# Altium PCB PWR_BOard_final.PcbDoc (part 2 of 2)
Units mm, origin at the board's own origin, x right, y up, seen from the top; angles counter-clockwise.
Board outline 72 x 52 mm, 2 copper layers (Top Layer, Bottom Layer); 122 components, 53 nets, 264 pads, 86 vias.
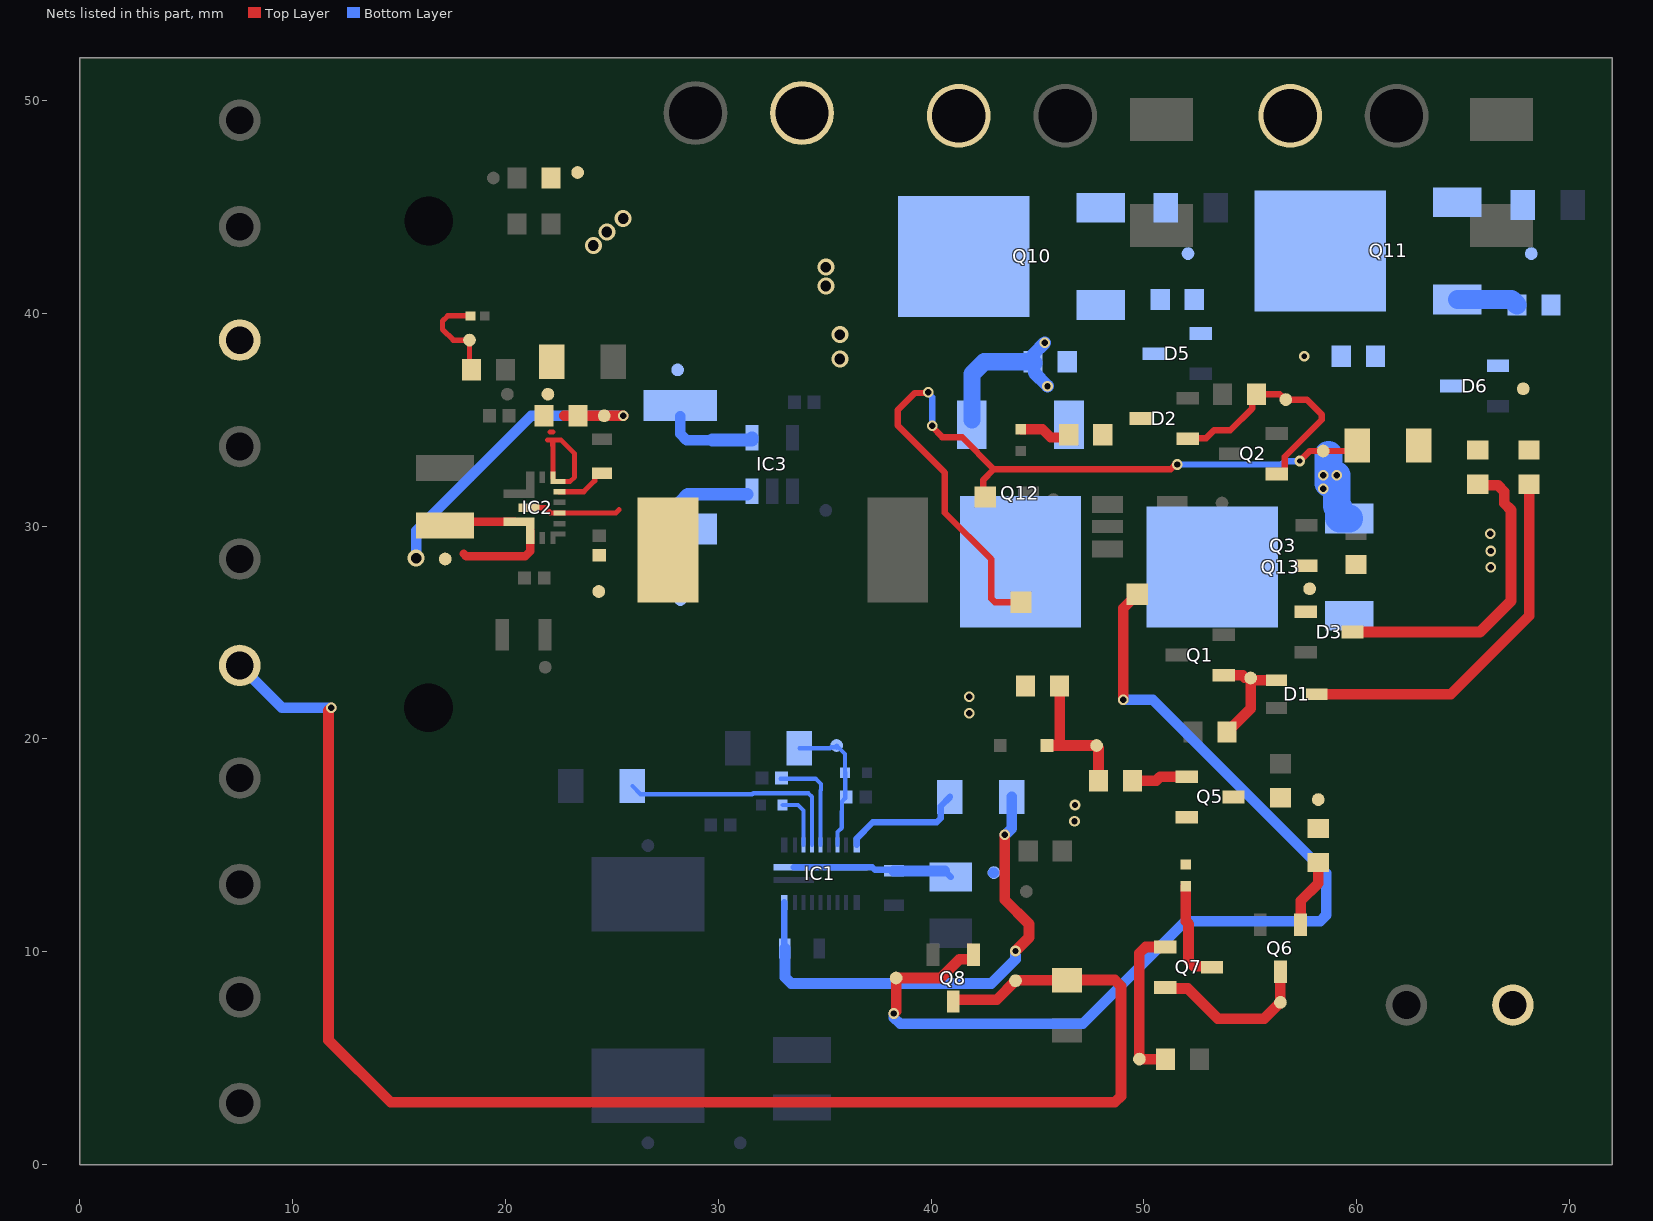
[diagram p2: the nets of this part, all layers, seen from the top]

## Via types
v1: diameter 0.8, hole 0.5, Top Layer to Bottom Layer, 43 vias
v2: diameter 0.5, hole 0.3, Top Layer to Bottom Layer, 34 vias
v3: diameter 0.5, hole 0.25, Top Layer to Bottom Layer, 6 vias
v4: diameter 0.4, hole 0.25, Top Layer to Bottom Layer, 3 vias

## Nets (pads, with @x,y where several pads share a name; then routed paths per layer and width w, separated by ;. In a path a pad name is that pad's centre, name@x,y a point inside that pad or via, vN(x,y) a via of type N, cw(c..) or ccw(c..) an arc to the next point about the centre after c; other vN are vias at no path point) (continued)
NetCcomp2_1: Ccomp2.1 Rcomp2.1 TP27.TP? | length 4.8
  Top Layer w0.25: Ccomp2.1@18.337,39.852 Ccomp2.1@18.362,39.878 17.295,39.878 17.041,39.624 17.041,39.243 17.549,38.735 TP27.TP?@18.311,38.735 18.311,37.427 Rcomp2.1@18.4,37.338
NetCff1_2: Cff1.2 IC1.7 Rfbb1.1 Rfbt1.2 TP20.TP? | length 6.8
  Bottom Layer w0.2: Rfbb1.1@33.814,19.558 35.243,19.558 35.293,19.608 TP20.TP?@35.483,19.608 ; TP20.TP?@35.56,19.577 TP20.TP?@35.56,19.685 35.951,19.295 35.951,18.424 Rfbt1.2@35.96,18.415 35.96,17.228 Cff1.2@35.964,17.224 ; IC1.7@35.601,15.02 35.601,15.62 35.801,15.82 35.801,16.588 35.812,16.599 35.812,17.062 Cff1.2@35.964,17.214
NetCss1_1: Css1.1 IC1.5 | length 4.9
  Bottom Layer w0.2: Css1.1@32.927,18.13 34.575,18.13 34.82,17.885 34.82,17.592 34.801,17.573 34.801,16.308 34.801,15.826 34.801,15.696 IC1.5@34.801,15.02
NetCvcc1_1: Cvcc1.1 IC1.19 Rpg1.2 | length 23.5
  Top Layer w0.5: v2(43.457,15.494) 43.457,12.446 44.6,11.303 44.6,10.668 v2(43.965,10.033)
  Bottom Layer w0.2: IC1.19@33.101,12.32 IC1.19@33.117,12.304 ; Cvcc1.1@33.117,10.175 Cvcc1.1@33.132,10.16
  Bottom Layer w0.3: IC1.19@33.101,12.32 33.101,10.191 Cvcc1.1@33.117,10.175
  Bottom Layer w0.5: Cvcc1.1@33.132,10.16 33.132,8.802 33.425,8.509 42.822,8.509 43.965,9.652 v2(43.965,10.033) ; v2(43.457,15.494) 43.492,15.494 43.785,15.787 Rpg1.2@43.785,17.272
NetCvcc2_1: Cvcc2.1 IC2.11 | length 2.5
  Top Layer w0.25: IC2.11@22.534,31.611 23.671,31.611 24.189,32.129 24.189,32.329 24.334,32.474 Cvcc2.1@24.534,32.474
NetD1_1: D1.1 Q1.1 R10.1 TP8.TP? | length 5.3
  Top Layer w0.5: Q1.1@53.744,22.987 54.633,22.987 TP8.TP?@54.741,22.879 ; R10.1@53.909,20.32 53.909,20.37 54.109,20.57 54.159,20.57 55.014,21.425 TP8.TP?@55.014,22.86 55.041,22.86 55.153,22.748 D1.1@56.223,22.748
NetD1_3: D1.3 R6.2 | length 17.7
  Top Layer w0.5: D1.3@58.123,22.098 64.412,22.098 68.095,25.781 R6.2@68.095,31.966
NetD2_1: D2.1 Q2.1 R11.1 TP9.TP? | length 11.6
  Top Layer w0.3: D2.1@52.05,34.102 52.068,34.12 52.918,34.12 53.293,34.495 54.053,34.495 55.083,35.525 55.083,35.995 R11.1@55.283,36.195 56.384,36.195 56.638,35.941 57.658,35.941 58.359,35.24 58.359,34.991 56.616,33.248 56.616,32.601 56.466,32.451 Q2.1@56.241,32.451
NetD2_3: D2.3 R8.2
NetD3_1: D3.1 Q3.1 R9.1 TP33.TP?
NetD3_3: D3.3 R23.2 | length 14.9
  Top Layer w0.5: D3.3@59.647,25.019 65.786,25.019 67.244,26.477 67.244,30.751 66.929,31.066 66.929,31.617 66.636,31.909 65.739,31.909 R23.2@65.682,31.966
NetD4_1: D4.1 R12.2 R13.1 TP28.TP? | length 6.8
  Top Layer w0.5: D4.1@45.446,19.685 46.046,19.685 ; R12.2@46.035,22.479 46.041,22.473 46.041,19.69 46.046,19.685 ; TP28.TP?@47.775,19.685 TP28.TP?@47.75,19.685 ; R13.1@47.864,18.034 47.864,19.569 47.75,19.683 TP28.TP?@47.75,19.685 ; 46.046,19.685 TP28.TP?@47.75,19.685
NetD5_1: D5.1 Q10.1 R19.1 R20.2 TP38.TP?
NetD5_3: D5.3 Q10.3 Q12.3 R20.1 R24.1
NetD6_1: D6.1 Q11.1 R21.2 R22.1 TP34.TP?
NetD6_3: D6.3 Q11.3 Q13.3 R21.1 R25.1 | length 2.9
  Bottom Layer w0.9: Q11.3@64.727,40.64 67.272,40.64 R21.1@67.526,40.386
NetIC1_3: IC1.3 Rtrip1.1 | length 2.7
  Bottom Layer w0.2: Rtrip1.1@33.024,16.891 33.749,16.891 34.001,16.639 IC1.3@34.001,15.02
NetIC1_4: IC1.4 Rmode1.1 | length 10.9
  Bottom Layer w0.2: Rmode1.1@25.963,17.78 26.344,17.399 31.596,17.399 31.638,17.441 34.242,17.441 34.401,17.282 34.401,16.474 34.401,15.53 IC1.4@34.401,15.02
NetIC1_9: IC1.9 Rpg1.1 | length 5.8
  Bottom Layer w0.3: IC1.9@36.501,15.02 36.501,15.318 37.261,16.078 40.266,16.078 40.454,16.266 40.454,16.841 Rpg1.1@40.885,17.272
NetLoudSpeaker_1: LoudSpeaker.1 Q8.3 R18.2 TP?.TP? | length 72.9
  Top Layer w0.5: v2(11.811,21.463) 11.684,21.336 11.684,5.842 14.605,2.921 48.625,2.921 48.918,3.214 48.918,8.375 48.625,8.668 R18.2@46.378,8.668 46.362,8.652 43.981,8.652 TP?.TP?@43.965,8.636 43.076,7.747 41.094,7.747 41.044,7.697 Q8.3@41.044,7.663
  Bottom Layer w0.5: LoudSpeaker.1@7.516,23.448 9.501,21.463 v2(11.811,21.463)
NetNT1_2: NT1.2 NT2.1 R7.2 TP50.TP? | length 38.4
  Top Layer w0.3: v2(39.859,36.287) 39.821,36.249 39.225,36.249 38.423,35.447 38.423,34.729 40.64,32.512 40.64,30.63 42.822,28.448 42.822,26.592 42.998,26.416 NT1.2@44.219,26.416 ; v2(40.048,34.714) 40.048,34.66 40.511,34.197 40.511,34.165 41.457,34.165 42.949,32.673 ; NT2.1@42.441,31.369 42.441,32.165 42.949,32.673 ; v2(51.562,32.893) 51.481,32.893 51.261,32.673 42.949,32.673 ; v3(57.315,33.058) 57.785,33.528 59.766,33.528 R7.2@60.02,33.782
  Bottom Layer w0.3: v2(39.859,36.287) 39.859,36.233 40.048,36.044 v2(40.048,34.714) ; v2(51.562,32.893) 56.465,32.893 56.615,33.043 57.3,33.043 v3(57.315,33.058)
NetQ5_1: Q5.1 R13.2 | length 2.6
  Top Layer w0.5: R13.2@49.464,18.034 50.569,18.034 50.757,18.222 Q5.1@52.009,18.222
NetQ5_3: Q5.3 R14.1 R15.1 TP29.TP?
NetQ6_1: Q6.1 R14.2 | length 3.3
  Top Layer w0.5: Q6.1@57.361,11.26 57.368,11.267 57.368,12.387 58.189,13.208 R14.2@58.189,14.186
NetQ6_3: Q6.3 Q7.2 TP30.TP? | length 7.8
  Top Layer w0.5: Q7.2@50.993,8.321 51.043,8.271 52.054,8.271 53.467,6.858 55.649,6.858 TP30.TP?@56.411,7.62 Q6.3@56.411,9.06
NetQ7_1: Q7.1 R31.1 TP31.TP? | length 7.5
  Top Layer w0.5: Q7.1@50.993,10.221 50.077,10.221 49.784,9.928 TP31.TP?@49.784,4.953 R31.1@51.016,4.953
NetQ7_3: Q7.3 R17.1 | length 4.8
  Top Layer w0.5: R17.1@51.966,13.077 51.966,11.43 52.093,11.303 52.093,9.564 52.336,9.321 53.143,9.321 Q7.3@53.193,9.271
NetQ12_1: "Switch PMOS.2" Q12.1 Q13.1 R24.2 R25.2 | length 11.7
  Bottom Layer w0.6: R24.2@44.793,37.719 44.793,38.062 v2(45.339,38.608) ; R24.2@44.843,37.669 44.843,37.199 v2(45.466,36.576)
  Bottom Layer w0.8: Q12.1@41.91,34.983 41.91,37.133 42.496,37.719 R24.2@44.793,37.719 R24.2@44.843,37.669
  Bottom Layer w1.3: 58.674,32.004 58.674,33.353 ; v2(59.055,32.385) 59.055,30.945 59.154,30.846 59.154,30.401 59.203,30.353 Q13.1@59.647,30.353
  other v2: 66.294,28.067 66.294,28.829 66.271,29.631 58.42,31.75 58.42,32.385
  other v3: 57.531,37.973
On/Off: NT3.2 Q8.1 TP51.TP? | length 48.8
  Top Layer w0.5: v2(38.25,7.097) 38.354,7.201 TP51.TP?@38.354,8.763 40.455,8.763 41.332,9.639 41.944,9.639 41.994,9.689 Q8.1@41.994,9.863 ; v2(49.022,21.844) 49.022,26.139 NT3.2@49.68,26.797
  Bottom Layer w0.5: v2(38.25,7.097) 38.25,6.902 38.543,6.609 47.122,6.609 51.943,11.43 58.277,11.43 58.57,11.723 58.57,13.693 50.419,21.844 v2(49.022,21.844)
out_Batt: "Engine Supply.1" Cin1.1 Cinx1.1 IC1.10 IC1.21 IC3.4 Q5.2 R1.2 R5.1 R6.1 R7.1 R8.1 R12.1 R17.2 R23.1 Rshunt.2 TP3.TP? TP7.TP? TP16.TP? TP35.TP? | length 14.3
  Top Layer w0.475: R5.1@44.219,34.548 45.232,34.548 45.617,34.163 R8.1@46.34,34.163
  Bottom Layer w0.3: IC1.21@33.551,13.97 IC1.10@36.051,13.97 37.234,13.97 37.361,13.843 38.199,13.843 Cinx1.1@38.25,13.792 ; Cin1.1@40.637,13.792 Cin1.1@40.917,13.512
  Bottom Layer w0.5: Rshunt.2@28.217,35.158 28.217,34.329 28.51,34.036 29.712,34.036 ; Cinx1.1@38.25,13.792 Cin1.1@40.637,13.792 ; TP16.TP?@42.922,13.716 TP16.TP?@42.949,13.716
  Bottom Layer w0.6: 29.712,34.036 31.585,34.036 IC3.4@31.585,34.143
  other v1: 35.71,37.846 35.71,38.989 35.052,41.275 35.052,42.164 24.13,43.18 24.765,43.815 25.527,44.45
  other v2: 46.736,16.129 46.759,16.891 41.783,21.209 41.783,21.971
Out_Batt1: Batt2.2 Q11.2
Out_Batt2: Batt1.2 Q10.2
SW: Cbst2.1 IC2.4 IC2.9 L2.2 TP22.TP? | length 4.4
  Top Layer w0.25: IC2.4@21.109,30.861 21.859,30.861 22.109,30.611 IC2.9@22.534,30.611 25.18,30.611 25.334,30.765
Ubatt: IC3.3 Q12.2 Q13.2 Rshunt.1 TP36.TP? | length 5.1
  Bottom Layer w0.6: Rshunt.1@28.217,29.358 28.217,31.145 28.568,31.496 IC3.3@31.348,31.496
Vfb: IC2.1 IC2.12 Rfbb2.2 Rfbt2.1 TP25.TP? | length 5.3
  Top Layer w0.225: 21.971,34.036 22.225,34.036 22.615,34.036 23.248,33.403 23.248,32.301 23.045,32.098 IC2.12@22.584,32.098 ; 22.098,34.417 22.234,34.417
  Top Layer w0.25: 22.225,34.036 22.225,33.782 22.234,33.773 IC2.1@22.234,32.274
Vout1: +12V.2 Cout2.1 IC2.5 IC2.14 Rfbt2.2 TP23.TP? TP24.TP? | length 23.2
  Top Layer w0.4: v1(15.805,28.488) v1@15.845,28.448 ; Cout2.1@17.168,30.019 17.36,30.211 IC2.14@20.434,30.211 ; 18.034,28.702 18.161,28.575 20.925,28.575 21.159,28.809 IC2.5@21.159,29.786
  Top Layer w0.5: 22.76,35.179 Rfbt2.2@23.406,35.179 23.899,35.179 TP24.TP?@24.384,35.179 ; TP24.TP?@24.638,35.179 v2(25.527,35.179)
  Bottom Layer w0.5: v1(15.805,28.488) 15.805,29.775 21.209,35.179 25.273,35.179
pads on no net: D1.2 D2.2 D3.2 D5.2 D6.2
copper on no net: | length 248
  Top Layer w0.254: 0,0 72,0 72,52 0,52 0,0

## Polygon pours and split planes (outlines as drawn)
GND on Bottom Layer "GND_L02_P108" (solid, remove dead copper, pour order 108): 0,52 0,0 72,0 72,52
NetQ12_1 on Bottom Layer "NETQ12_1_L02_P104" (solid, pour order 104): 57.15,38.481 57.15,37.211 57.404,37.211 57.912,36.703 57.912,31.369 59.69,31.369 59.69,32.004 59.69,38.481
NetD6_3 on Bottom Layer "NETD6_3_L02_P098" (solid, pour order 98): 68.15,41.348 68.15,39.702 68.072,39.624 65.532,39.624 65.532,36.195 65.532,24.765 59.944,24.765 59.944,38.735 62.738,38.735 62.738,41.402
NetD5_3 on Bottom Layer "NETD5_3_L02_P095" (solid, pour order 95): 45.974,33.528 45.974,41.198 51.308,41.198 51.308,35.941 48.895,33.528
NetD6_1 on Bottom Layer "NETD6_1_L02_P097" (solid, pour order 97): 62.992,46.609 62.992,43.434 66.294,43.434 68.326,41.402 68.326,39.116 68.453,38.989 67.945,38.481 65.786,38.481 65.786,36.957 69.088,36.957 70.104,37.973 70.104,42.672 69.85,42.672 68.622,43.9 68.622,46.609
NetQ12_1 on Bottom Layer "NETQ12_1_L02_P103" (solid, pour order 103): 65.913,31.496 65.913,11.811 64.897,10.795 64.897,4.064 70.612,4.064 70.739,4.191 70.612,4.318 70.612,13.716 69.215,15.113 69.215,31.369
Out_Batt1 on Bottom Layer "OUT_BATT1_L02_P102" (solid, pour order 102): 58.801,47.879 59.239,47.879 61.017,46.101 58.801,46.101
Ubatt on Bottom Layer "UBATT_L02_P101" (solid, pour order 101): 30.128,28.652 30.149,28.652 31.242,27.559 30.226,27.559
Ubatt on Bottom Layer "UBATT_L02_P099" (solid, pour order 99): 25.55,30.584 25.55,22.606 56.515,22.606 56.515,30.861 39.624,30.861 39.624,29.337 38.227,27.94 30.353,27.94 30.353,30.584
NetD6_3 on Bottom Layer "NETD6_3_L02_P100" (solid, pour order 100): 61.044,28.067 61.044,24.765 58.42,24.765 58.42,28.067
Out_Batt1 on Bottom Layer "OUT_BATT1_L02_P096" (solid, pour order 96): 54.61,51.689 54.61,47.117 54.864,46.863 54.991,46.863 54.991,40.132 61.214,40.132 61.214,46.355 59.309,46.355 59.309,51.562 59.182,51.689
NetD5_1 on Bottom Layer "NETD5_1_L02_P093" (solid, pour order 93): 46.482,45.847 46.482,42.926 50.419,42.926 51.689,41.656 51.689,38.608 53.34,38.608 53.34,40.005 53.34,43.434 52.451,43.434 51.816,44.069 51.816,45.847
Out_Batt2 on Bottom Layer "OUT_BATT2_L02_P092" (solid, pour order 92): 43.563,47.063 44.636,46.094 43.56,46.065
Out_Batt2 on Bottom Layer "OUT_BATT2_L02_P091" (solid, pour order 91): 37.846,51.689 37.846,39.751 44.704,39.751 44.704,40.132 44.704,46.101 44.069,46.101 44.069,51.689
out_Batt on Bottom Layer "OUT_BATT_L02_P055" (solid, pour order 55): 28.789,45.847 25.296,45.847 11.557,32.108 11.557,24.511 21.359,24.511 22.441,20.828 42.822,20.828 42.822,22.352 24.661,22.352 22.987,27.432 14.628,27.432 14.628,29.591 25.931,40.894 28.852,40.894
Ubatt on Bottom Layer "UBATT_L02_P018" (solid, pour order 18): 52.601,22.606 25.55,22.606 25.55,29.083 52.601,29.083
Ubatt on Bottom Layer "UBATT_L02_P002" (solid, pour order 2): 37.211,35.179 40.155,35.179 40.155,23.759 37.211,23.759
NetCboot1_2 on Bottom Layer "NETCBOOT1_2_L02_P062" (solid, pour order 62): 28.188,16.387 28.188,14.516 28.158,14.486 28.165,14.478 30.025,14.478 30.025,16.379
+5V on Bottom Layer "+5V_L02_P039" (solid, pour order 39): 14.628,6.985 14.628,0.635 42.695,0.635 42.695,3.302 29.845,3.302 29.845,6.985
NetCboot1_2 on Bottom Layer "NETCBOOT1_2_L02_P029" (solid, pour order 29): 23.241,15.756 23.241,11.43 31.011,11.43 31.011,12.7 31.265,12.954 34.948,12.954 34.948,13.589 29.337,13.589 29.337,15.716
GND on Bottom Layer "GND_L02_P070" (solid, pour order 70): 33.383,12.459 33.383,11.049 33.775,11.049 33.775,9.155 39.255,9.155 39.266,9.144 42.441,9.144 42.441,11.811 42.314,11.938 39.012,11.938 39.012,12.474
out_Batt on Bottom Layer "OUT_BATT_L02_P053" (solid, remove dead copper, pour order 53): 34.605,14.39 34.6,14.385 34.6,13.659 36.91,13.659 37.488,13.081 39.647,13.081 42.275,12.7 43.838,12.319 43.838,14.482
+5V on Bottom Layer "+5V_L02_P049" (solid, pour order 49): 13.589,23.577 13.589,6.35 21.082,6.35 21.082,23.637
out_Batt on Bottom Layer "OUT_BATT_L02_P020" (solid, pour order 20): 26.182,34.925 30.226,34.925 30.226,36.322 36.472,36.322 36.472,51.689 31.773,51.689 31.773,45.847 26.396,45.847
+5V on Bottom Layer "+5V_L02_P042" (solid, pour order 42): 20.32,0.608 10.16,0.608 10.16,10.16 4.595,10.16 4.595,19.812 20.32,19.812
+5V on Bottom Layer "+5V_L02_P051" (solid, pour order 51): 36.599,16.749 39.502,16.749 39.502,19.308 36.599,19.308
out_Batt on Bottom Layer "OUT_BATT_L02_P089" (solid, pour order 89): 45.411,16.28 45.411,16.099 45.411,14.017 43.775,14.017
out_Batt on Bottom Layer "OUT_BATT_L02_P088" (solid, pour order 88): 43.272,21.209 45.847,21.209 45.847,18.849
out_Batt on Bottom Layer "OUT_BATT_L02_P057" (solid, remove dead copper, pour order 57): 40.409,22.352 40.409,20.828 45.235,20.828 45.235,14.439 39.266,14.256 39.266,12.7 42.275,12.7 43.838,12.319 48.283,12.319 48.283,18.836 48.283,22.352
out_Batt on Bottom Layer "OUT_BATT_L02_P081" (solid, pour order 81): 14.351,28.813 14.351,26.797 16.205,26.797
+5V on Bottom Layer "+5V_L02_P079" (solid, pour order 79): 29.845,6.985 32.169,3.175 29.47,3.175
+5V on Bottom Layer "+5V_L02_P080" (solid, pour order 80): 36.83,5.415 36.83,2.921 35.327,2.921
+5V on Bottom Layer "+5V_L02_P071" (solid, pour order 71): 17.78,12.986 19.939,8.128 21.19,5.461 17.78,5.461
NetCboot1_1 on Bottom Layer "NETCBOOT1_1_L02_P030" (solid, pour order 30): 30.104,15.367 30.104,16.454 31.728,16.454 32.346,16.454 32.346,15.367
+5V on Bottom Layer "+5V_L02_P068" (solid, pour order 68): 36.322,0.635 36.322,5.969 42.695,5.969 42.695,0.635
out_Batt on Bottom Layer "OUT_BATT_L02_P063" (solid, pour order 63): 34.694,40.005 34.694,36.703 36.98,36.703 36.98,40.005
GND on Top Layer "GND_L01_P109" (solid, pour order 109): 0,52 0,0 72,0 72,52
NetQ12_1 on Top Layer "NETQ12_1_L01_P107" (solid, pour order 107): 58.166,38.989 58.166,37.211 48.387,37.211 46.976,35.8 44.821,35.8 44.821,38.979 44.831,38.989
NetQ12_1 on Top Layer "NETQ12_1_L01_P105" (solid, pour order 105): 66.802,30.226 66.802,27.432 66.675,27.559 64.008,27.559 60.325,31.242 57.785,31.242 57.785,32.766 58.928,32.766
out_Batt on Top Layer "OUT_BATT_L01_P061" (solid, pour order 61): 34.694,39.878 34.694,36.703 43.18,36.703 43.18,34.254 43.675,34.254 44.473,34.254 44.473,35.052 44.473,38.894 43.113,39.878
NetD2_3 on Top Layer "NETD2_3_L01_P022" (solid, pour order 22): 47.396,33.798 47.396,34.798 49.226,34.798 49.276,35.433 50.353,35.433 50.353,33.771
out_Batt on Top Layer "OUT_BATT_L01_P058" (solid, pour order 58): 45.593,17.272 45.593,15.24 52.728,15.24 52.728,17.207 52.728,17.272
out_Batt on Top Layer "OUT_BATT_L01_P031" (solid, pour order 31): 51.077,13.716 51.077,17.145 52.728,17.145 52.728,13.716
NetQ5_3 on Top Layer "NETQ5_3_L01_P027" (solid, pour order 27): 53.363,17.907 59.332,17.907 59.459,17.78 59.459,15.113 53.49,15.113 53.363,15.24
NetD3_1 on Top Layer "NETD3_1_L01_P024" (solid, pour order 24): 56.792,28.692 58.687,28.692 61.237,28.692 61.237,26.543 61.11,26.416 58.697,26.416 58.697,25.654 56.792,25.654
Vfb on Top Layer "VFB_L01_P036" (solid, pour order 36): 22.615,33.528 21.336,33.528 21.336,38.735 22.987,38.735 22.987,36.703 22.606,35.941 22.606,34.036
out_Batt on Top Layer "OUT_BATT_L01_P059" (solid, pour order 59): 26.398,44.432 22.763,47.879 21.336,47.879 21.336,44.981 22.883,43.434 24.141,42.175
+5V on Top Layer "+5V_L01_P052" (solid, pour order 52): 38.631,3.429 35.837,3.429 28.957,3.429 28.957,19.304 36.943,19.304 39.497,19.304 39.497,16.53 32.258,16.289 32.258,6.35 38.631,6.35
SW on Top Layer "SW_L01_P087" (solid, pour order 87): 24.574,30.765 24.838,30.765 25.334,30.765 25.334,31.695
SW on Top Layer "SW_L01_P038" (solid, remove dead copper, pour order 38): 20.525,31.186 20.534,31.177 20.534,30.561 21.721,30.561 21.737,30.545 21.737,30.41 25.459,30.41 25.972,31.051 25.871,29.098 23.775,29.098 23.752,29.075 23.759,29.068 23.759,24.511 29.083,24.511 29.083,32.766 26.035,32.766 25.146,31.877 25.146,30.84 22.121,30.84 22.121,31.176
GND on Top Layer "GND_L01_P037" (solid, remove dead copper, pour order 37): 21.486,31.242 19.327,31.242 19.327,32.004 15.009,32.004 15.009,35.814 19.551,35.814 19.708,35.656 19.708,33.147 21.486,33.147
Vout1 on Top Layer "VOUT1_L01_P078" (solid, pour order 78): 12.954,33.528 16.51,29.972 12.954,29.972
Vout1 on Top Layer "VOUT1_L01_P047" (solid, pour order 47): 15.898,30.835 15.898,27.686 10.795,27.686 10.795,34.821 8.913,36.703 4.976,36.703 4.976,41.021 12.977,41.021 14.12,41.021 14.12,33.02 14.12,30.887
out_Batt on Top Layer "OUT_BATT_L01_P086" (solid, pour order 86): 64.421,41.148 66.675,41.148 66.675,39.345
out_Batt on Top Layer "OUT_BATT_L01_P064" (solid, pour order 64): 34.29,40.767 49.553,40.767 66.167,40.767 66.167,35.814 68.73,35.814 68.73,41.506 67.564,42.672 34.29,42.672
+5V on Top Layer "+5V_L01_P046" (solid, remove dead copper, pour order 46): 36.472,31.369 40.409,31.369 40.409,20.574 19.431,20.574 19.431,23.749 22.883,23.749 36.472,23.749
Vout1 on Top Layer "VOUT1_L01_P035" (solid, pour order 35): 15.009,30.861 19.357,30.861 19.694,30.524 21.364,30.524 21.364,28.579 18.906,28.535 18.057,27.686 15.009,27.686
out_Batt on Top Layer "OUT_BATT_L01_P076" (solid, pour order 76): 41.783,37.211 43.942,35.052 43.942,37.211
+5V on Top Layer "+5V_L01_P075" (solid, pour order 75): 31.75,15.367 33.909,16.661 32.299,16.678 31.625,16.661
+5V on Top Layer "+5V_L01_P074" (solid, pour order 74): 32.004,8.654 34.401,6.096 32.004,6.096
+5V on Top Layer "+5V_L01_P073" (solid, pour order 73): 36.83,25.654 34.163,22.987 36.83,22.987
out_Batt on Top Layer "OUT_BATT_L01_P056" (solid, pour order 56): 41.171,22.987 41.171,20.828 44.981,20.828 44.981,22.987
out_Batt on Top Layer "OUT_BATT_L01_P023" (solid, pour order 23): 64.539,36.957 64.539,32.766 68.73,32.766 68.73,36.957
out_Batt on Top Layer "OUT_BATT_L01_P065" (solid, pour order 65): 61.618,34.798 61.618,32.766 68.73,32.766 68.73,34.682 68.699,34.713
NetBatt2_1 on Top Layer "NETBATT2_1_L01_P011" (solid, pour order 11): 59.616,51.913 59.616,46.745 69.014,46.745 69.014,51.913
NetBatt1_1 on Top Layer "NETBATT1_1_L01_P010" (solid, pour order 10): 44.092,51.777 44.092,46.609 53.49,46.609 53.49,51.777

## Other copper
Top Layer:
  pour cut-out: 60.721,28.692 60.721,27.49 60.518,27.49 59.579,26.416 61.11,26.416 61.237,26.543 61.237,28.692
  pour cut-out: 57.188,27.579 57.118,27.509 57.118,26.523 56.818,26.523 56.792,26.549 56.792,27.48 56.859,27.547 56.859,27.579
  pour cut-out: 58.417,28.687 58.417,27.579 58.64,27.553 59.213,27.49 59.213,28.692
  pour cut-out: 58.376,26.523 58.518,26.476 58.697,26.416 58.697,25.654 58.376,25.654
  pour cut-out: 20.014,45.191 23.058,45.202 22.86,45.626 20.004,45.575
  pour cut-out: 32.383,15.675 37.157,15.675 37.211,15.621 37.211,11.684 32.385,11.684
  pour cut-out: 44.981,21.725 44.981,20.828 43.076,20.828 43.731,21.725
  pour cut-out: 52.47,13.716 52.728,13.716 52.726,13.718 52.726,14.849 52.47,14.592
  pour cut-out: 51.462,14.592 51.448,14.592 51.077,15.24 51.077,13.716 51.462,13.716
  pour cut-out: 19.037,33.561 19.052,28.161 23.809,28.161 23.809,33.561
  pour cut-out: 66.167,36.957 64.539,36.957 64.539,34.861
  pour cut-out: 24.973,28.067 25.958,27.082 25.962,27.082 25.962,28.046 25.941,28.067
  pour cut-out: 23.762,25.641 24.895,24.508 23.762,24.508 23.759,24.511
  pour cut-out: 28.829,25.654 27.686,24.511 28.892,24.511 28.902,24.522 28.902,25.642 28.894,25.65 27.755,24.511 28.781,24.511 28.902,24.632 28.902,25.649 28.901,25.65
  pour cut-out: 28.884,26.144 29.083,26.144 29.083,24.511 28.916,24.511 28.904,24.523
  pour cut-out: 12.215,41.021 14.097,41.021 14.097,39.139
  pour cut-out: 10.795,29.21 10.795,27.686 12.319,27.686
  pour cut-out: 24.511,24.511
  pour cut-out: 54.988,16.718 55.655,16.718 55.657,16.716 55.657,17.907 55.081,17.907 55,17.826 54.988,17.826
  pour cut-out: 24.971,28.069 24.973,28.067 25.941,28.067 25.943,28.065 25.955,28.078 25.955,29.014 25.871,29.098 24.971,29.098
  pour cut-out: 20.955,47.879 22.86,47.879 22.86,47.079 20.955,47.079
  pour cut-out: 28.956,17.907 30.353,19.304 28.957,19.304
  pour cut-out: 28.957,5.461 30.861,3.429 28.957,3.429
  pour cut-out: 40.113,31.369 40.113,26.144 40.368,26.144 40.409,26.185 40.409,31.369
  pour cut-out: 36.472,31.369 36.449,31.346 36.449,26.162 36.737,26.162 36.755,26.144 36.755,31.369
  pour cut-out: 40.386,22.352 38.608,20.574 40.409,20.574
  pour cut-out: 48.664,45.466 48.664,42.672 48.791,42.799 65.174,42.799 65.174,45.569
Bottom Layer:
  pour cut-out: 45.974,38.989 45.974,38.473 47.097,38.473
  pour cut-out: 46.08,36.965 46.029,36.914 46.029,36.152 47.434,36.152 47.244,36.576 47.097,36.965
  pour cut-out: 59.944,31.496 61.468,31.496 61.468,29.083 59.944,29.083
  pour cut-out: 59.944,32.385 59.944,31.496 61.468,31.496
  pour cut-out: 63.33,41.373 63.33,41.396 62.833,41.396 62.828,41.401 62.739,41.312 62.738,41.312 62.738,41.048
  pour cut-out: 54.61,47.715 55.366,46.025 54.61,46.025
  pour cut-out: 55.556,24.952 55.556,22.621 55.541,22.606 54.356,22.606
  pour cut-out: 56.515,22.606 56.515,24.968 55.573,24.968 55.556,24.952 55.556,22.621
  pour cut-out: 47.295,30.861 49.869,30.861 49.865,30.857 49.865,30.462 47.313,30.462
  pour cut-out: 39.624,29.337 40.608,30.321 41.097,30.566 41.097,30.321 41.097,30.861 39.624,30.861
  pour cut-out: 61.066,25.015 61.044,24.993 61.044,24.765 62.484,24.765
  pour cut-out: 59.944,24.828 61.044,24.828 61.044,24.765 59.944,24.765
  pour cut-out: 59.944,28.067 58.42,28.067 58.42,26.733 58.822,26.733 58.833,26.745
  pour cut-out: 61.468,29.083 59.944,28.067 59.944,29.083
  pour cut-out: 65.211,37.13 65.213,37.128 65.538,37.128 65.538,35.566 65.532,35.56 65.213,36.02 65.211,36.022
  pour cut-out: 65.047,37.128 65.538,37.618 65.538,37.128
  pour cut-out: 59.944,38.735 59.944,36.996 60.167,37.219 60.167,38.727
  pour cut-out: 66.124,39.984 66.822,39.984 66.822,39.632 66.809,39.619 65.537,39.619 65.532,39.624 65.534,39.626 65.534,39.679 66.115,39.679 66.124,39.687
  pour cut-out: 68.422,41.14 68.422,39.632 68.347,39.557 68.326,39.557 68.326,41.135
  pour cut-out: 68.326,41.402 68.331,41.402 68.598,41.135 68.326,41.135
  pour cut-out: 62.992,44.196 63.267,44.196 63.33,44.259 63.34,44.25 63.943,44.259 64.863,43.434 62.992,43.434
  pour cut-out: 63.294,46.609 68.622,46.609 68.622,46.037 63.339,46.055
  pour cut-out: 63.33,44.537 63.33,44.26 63.293,44.26 63.229,44.196 62.992,44.196 62.992,46.609 63.313,46.609
  pour cut-out: 69.85,42.672 70.104,42.672 70.104,42.291
  pour cut-out: 68.453,38.989 68.326,39.116 68.326,39.557 68.401,39.632 68.611,39.632 68.612,39.632
  pour cut-out: 69.646,39.611 69.646,39.574 70.104,39.116 70.104,39.624 69.666,39.624 69.66,39.618
  pour cut-out: 69.83,41.14 69.83,39.632 70.096,39.632 70.104,39.624 70.104,41.133
  pour cut-out: 69.625,41.133 70.104,41.613 70.104,41.133
  pour cut-out: 67.434,37.205 67.411,37.182 67.411,36.972 68.057,36.972 68.072,36.957
  pour cut-out: 65.786,38.481 65.786,38.147 65.853,38.08 67.544,38.08 67.945,38.481
  pour cut-out: 44.636,45.771 44.634,45.773 44.634,46.096 44.699,46.096 44.704,46.101 44.704,45.771
  pour cut-out: 37.846,46.11 38.185,45.771 38.185,39.751 37.846,39.751
  pour cut-out: 37.601,51.871 37.521,51.951 37.521,51.969 37.027,51.969 36.951,51.894 36.951,40.545 37.296,40.2 37.451,40.2 37.451,38.876 37.465,38.862 37.515,38.912 37.826,38.912 37.826,45.428
  pour cut-out: 47.421,12.319 47.145,12.043 47.145,11.856 47.163,11.838 48.868,11.838 48.868,13.714 48.988,13.833 48.988,13.877 49.018,13.908 49.018,14.835 49.287,15.104 49.287,21.406 48.861,21.406 48.589,21.677 48.589,22.003 48.497,22.096 48.283,22.096 48.283,21.665 48.754,21.194 48.754,13.999 48.769,13.984 48.283,13.498 48.283,12.319
  pour cut-out: 42.277,30.594 42.085,30.594 42.06,30.619 42.06,30.988
  pour cut-out: 42.505,34.671 42.505,35.179 41.933,35.179 41.933,34.314 41.934,34.313
  pour cut-out: 13.581,23.998 13.571,19.771 14.061,19.167 18.202,19.167 18.636,19.771 18.636,24.008
  pour cut-out: 36.599,18.919 37.476,18.919 37.476,18.923 37.852,19.299 37.843,19.308 36.599,19.308
  pour cut-out: 42.706,2.585 42.695,2.574 42.695,0.635 40.894,0.635
  pour cut-out: 25.55,25.452 25.55,25.296 25.55,22.606 29.464,22.606
  pour cut-out: 48.283,14.137 48.283,12.319 46.755,12.319
  pour cut-out: 46.736,22.352 48.283,22.352 48.283,20.978
  pour cut-out: 43.838,14.372 43.75,14.446 42.176,14.456 42.176,14.283
  pour cut-out: 11.557,26.289 11.557,24.511 13.081,24.511
  pour cut-out: 18.909,33.561 18.909,28.161 23.809,28.161 23.809,33.561
  pour cut-out: 32.383,15.675 37.157,15.675 37.211,15.621 37.211,11.684 32.385,11.684
  pour cut-out: 30.025,14.478 30.025,15.393 29.09,15.393 29.337,14.478
  pour cut-out: 33.867,37.067 36.983,37.067 36.984,37.068 37.01,37.041 37.01,36.308 34.626,36.308
  pour cut-out: 30.196,36.645 30.226,36.615 30.226,36.322 33.146,36.322 33.357,36.533 33.357,37.067
  pour cut-out: 26.225,28.873 25.549,28.873 25.549,27.835 25.527,27.813
  pour cut-out: 30.196,30.353 30.376,30.353 30.368,30.345 30.368,29.059 30.196,28.887
  pour cut-out: 45.835,33.88 45.964,33.72 45.835,33.72
  pour cut-out: 26.238,28.887 26.224,28.873 25.549,28.873 25.549,30.352 25.55,30.353 26.238,30.353
  pour cut-out: 10.16,10.257 14.544,0.573 10.195,0.573 10.16,0.608

## Silkscreen, mask and mechanical layers (free items; w line width, h text height)
Top Overlay:
  drawing of 39 lines, arcs and shapes, not listed
  text "Ibatt" at 11.938,47.371 h0.6 r90
  text "-" at 28.575,46.563 h0.6
  text "-" at 61.849,46.563 h0.6
  text "+" at 33.782,46.509 h0.6
  text "-" at 46.101,46.436 h0.6
  text "+" at 41.148,46.382 h0.6
  text "+" at 56.642,46.382 h0.6
  text "Ubatt" at 11.811,42.672 h0.6 r90
  text "def" at 13.081,38.354 h0.6 r90
  text "GND" at 11.938,32.893 h0.6 r90
  text "+" at 11.911,27.94 h0.6 r90
  text "-" at 11.984,22.479 h0.6 r90
  text "+5V" at 11.938,17.145 h0.6 r90
  text "+5V" at 11.938,12.192 h0.6 r90
  text "GND" at 11.938,7.112 h0.6 r90
  text "Power Distribution Board" at 14.097,2.286 h1.1
  text "GND" at 12.065,1.143 h0.6 r90

## Text inside footprints (layer, text, board x,y; h text height)
IC1: Bottom Overlay "RefDes" at 35.436,15.575 h1.27 r90; Bottom Overlay "Designator946" at 31.905,15.169 h1.27 r90